# Altium PCB avbrd.PcbDoc
Units mm, origin at the board's own origin, x right, y up, seen from the top; angles counter-clockwise.
Board outline 46.23 x 57.78 mm, 2 copper layers (Top Layer, Bottom Layer), stack 1.671 mm thick; 35 components, 56 nets, 180 pads, 70 vias.
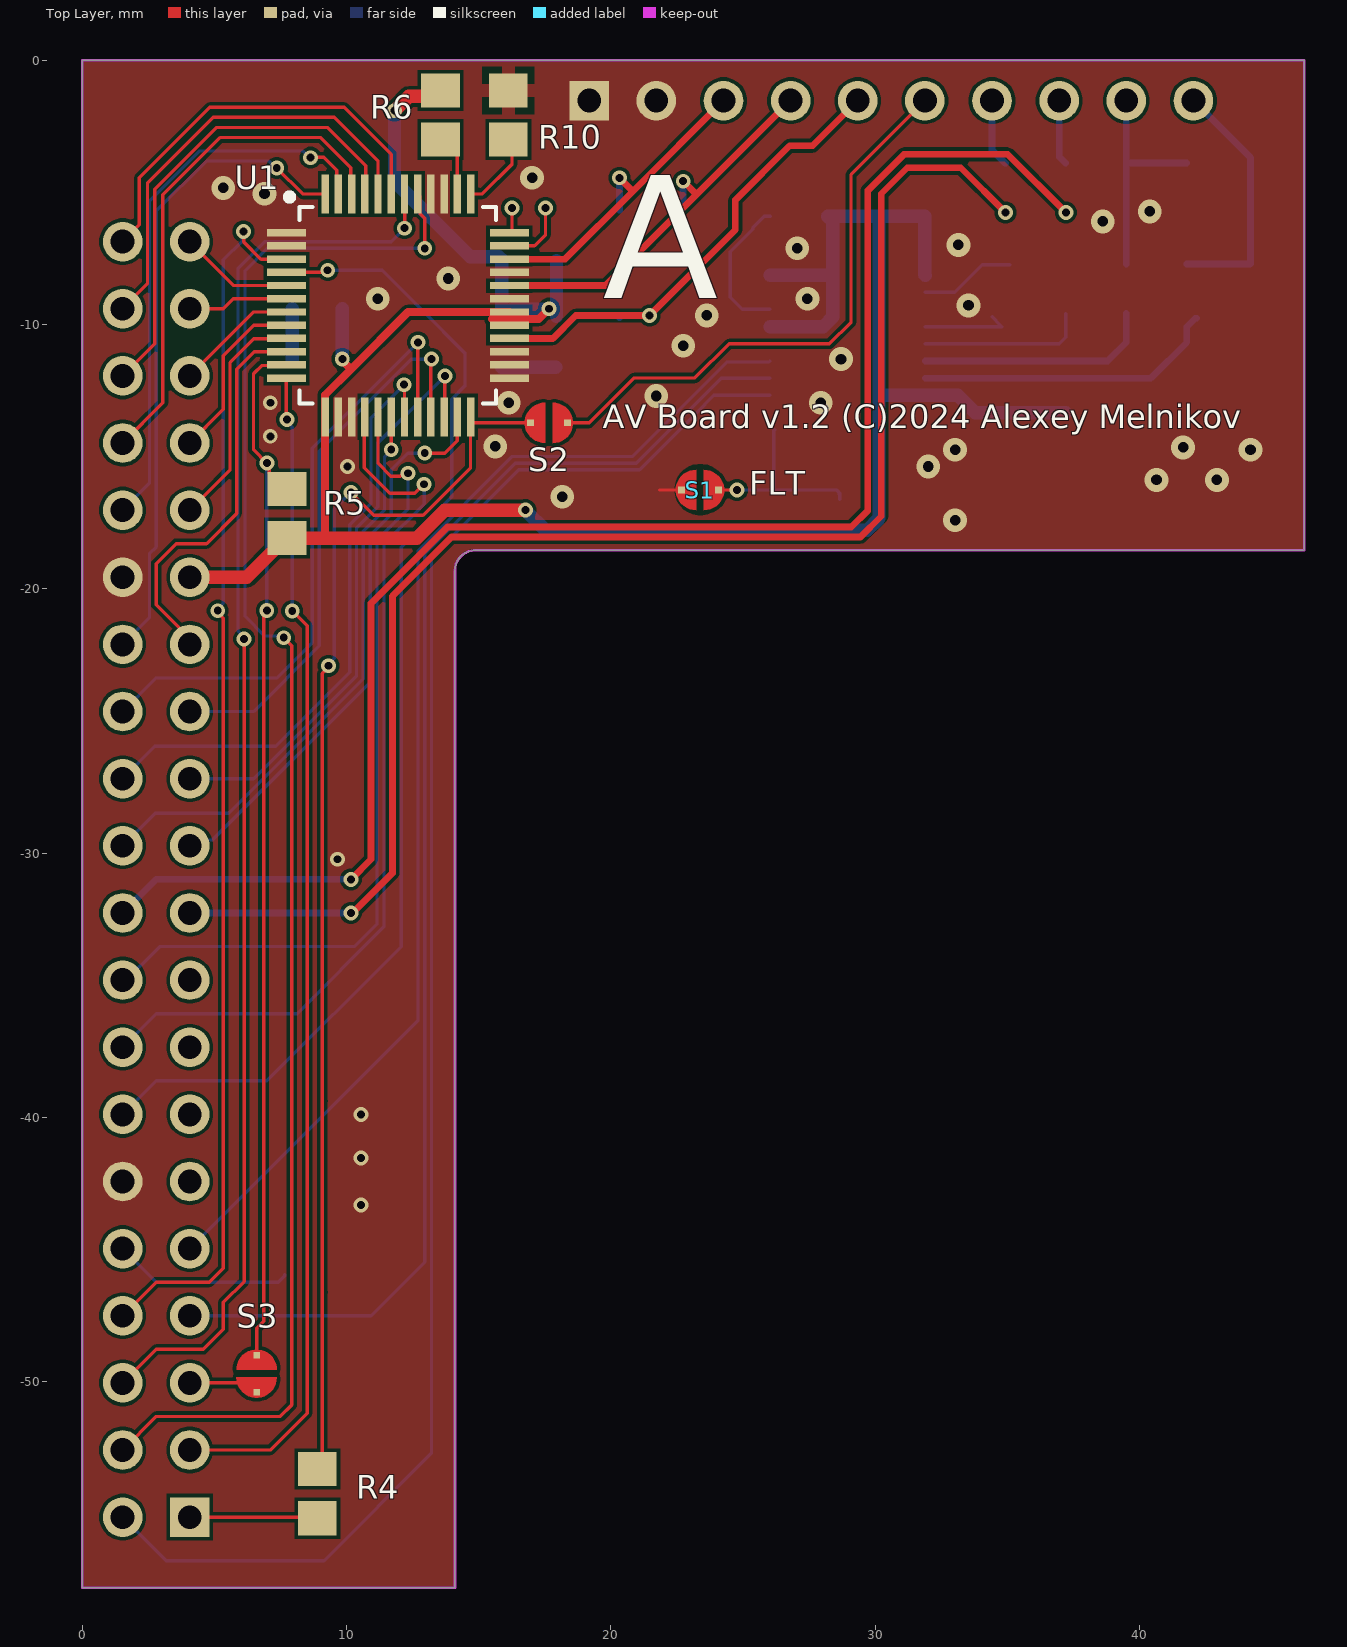
[diagram p0: Top Layer view]
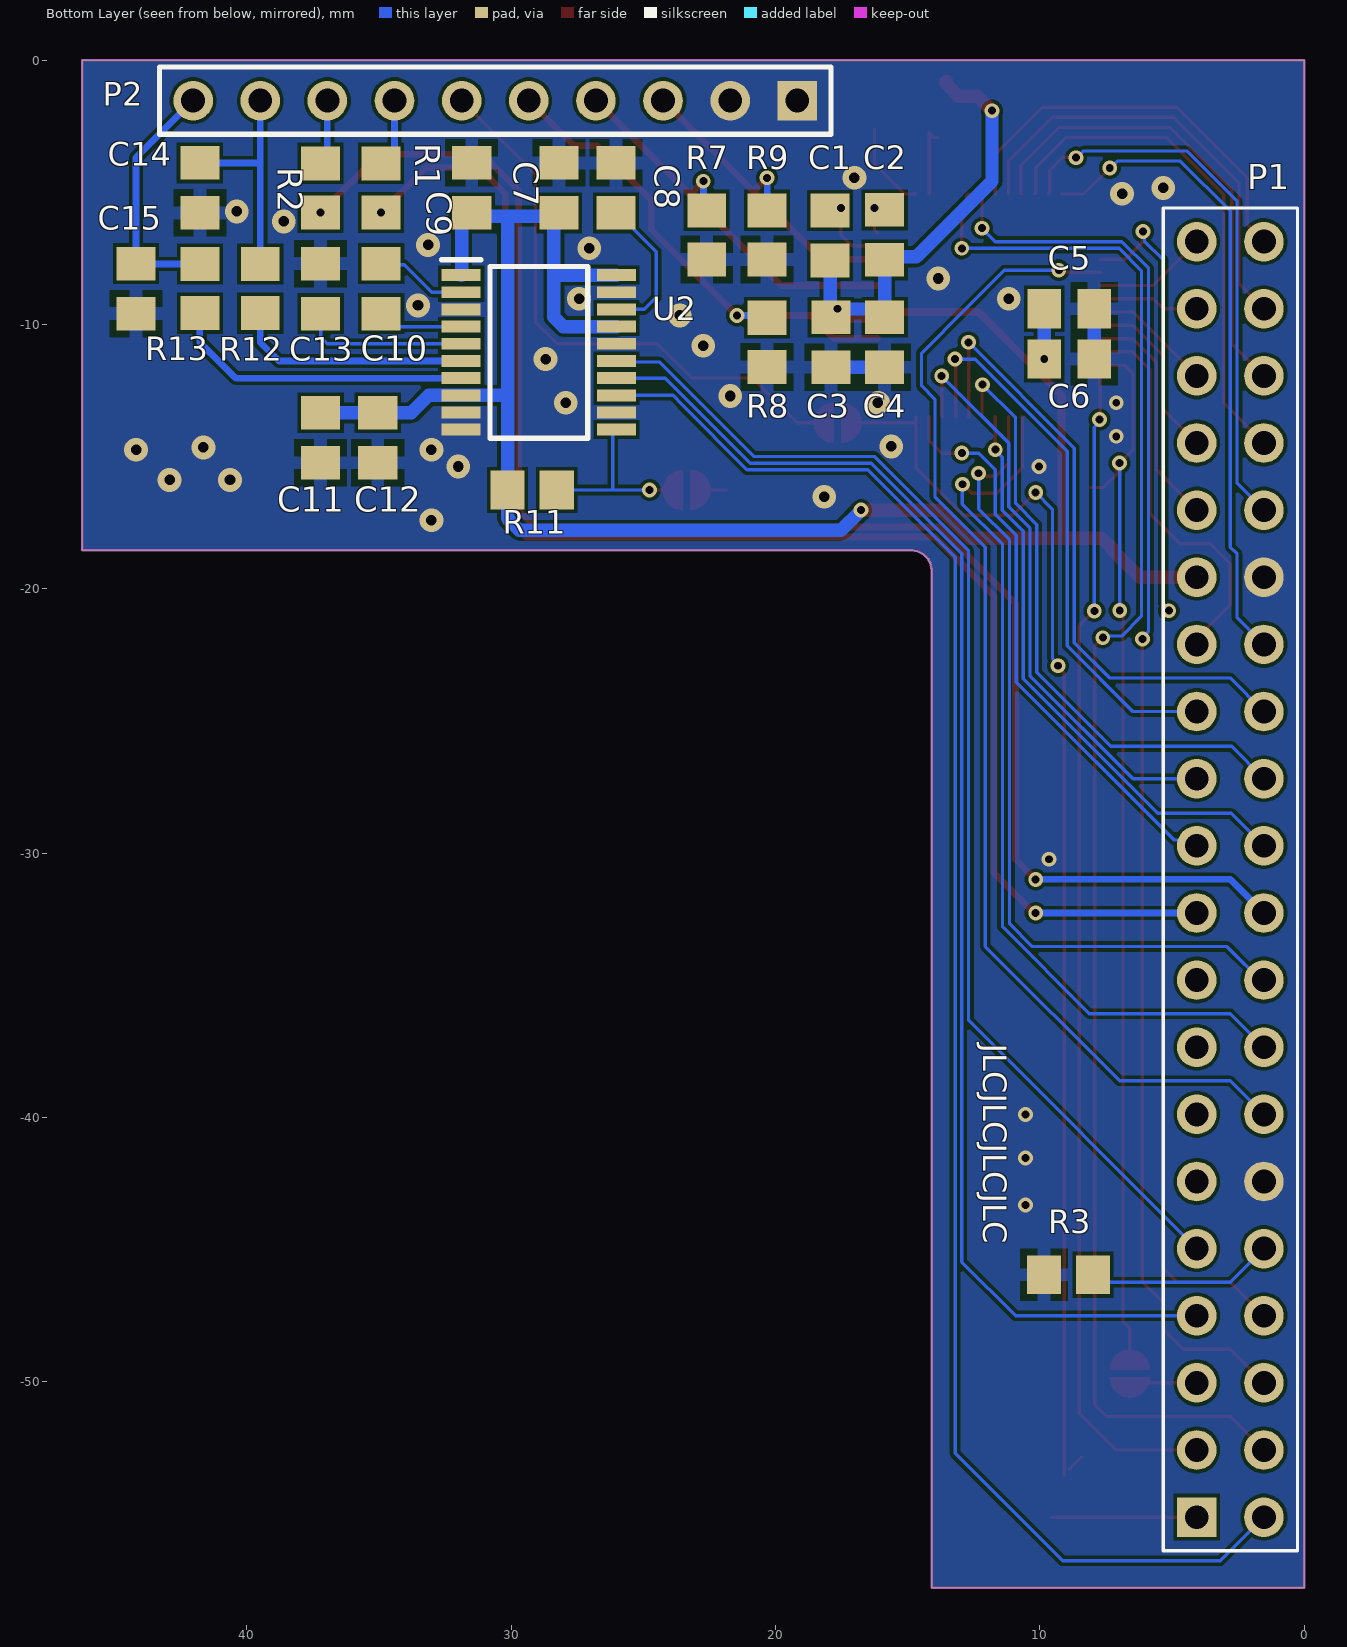
[diagram p1: Bottom Layer view, seen from below]
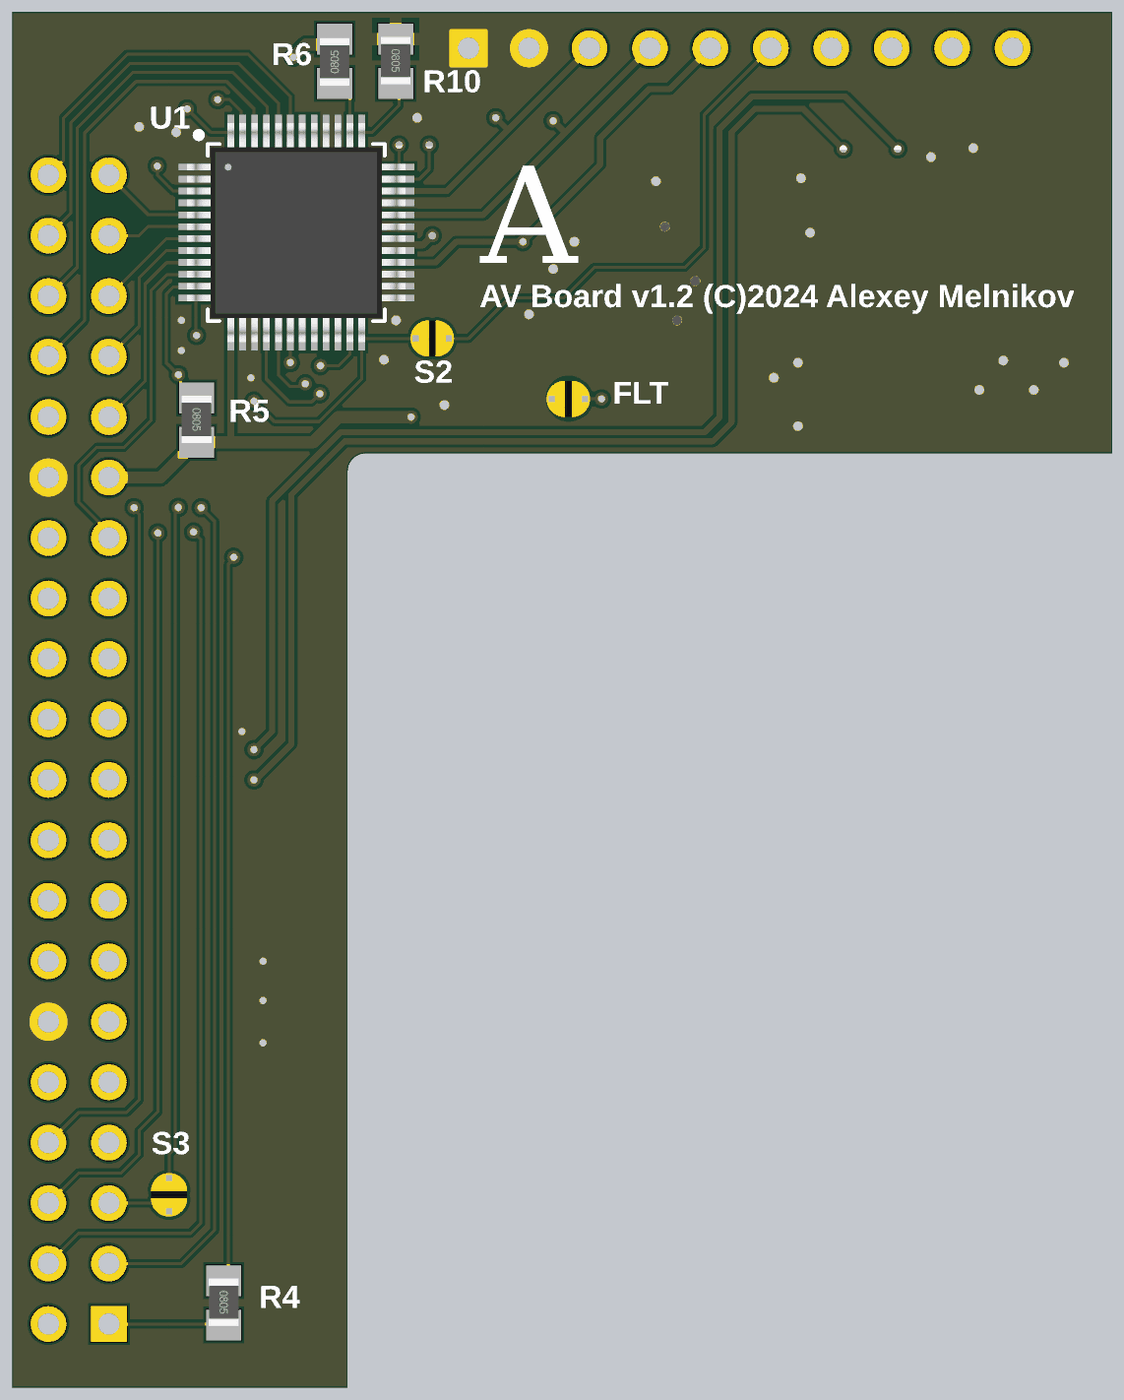
[diagram p2: 3D render of the assembled board from above, using the file's embedded part models]
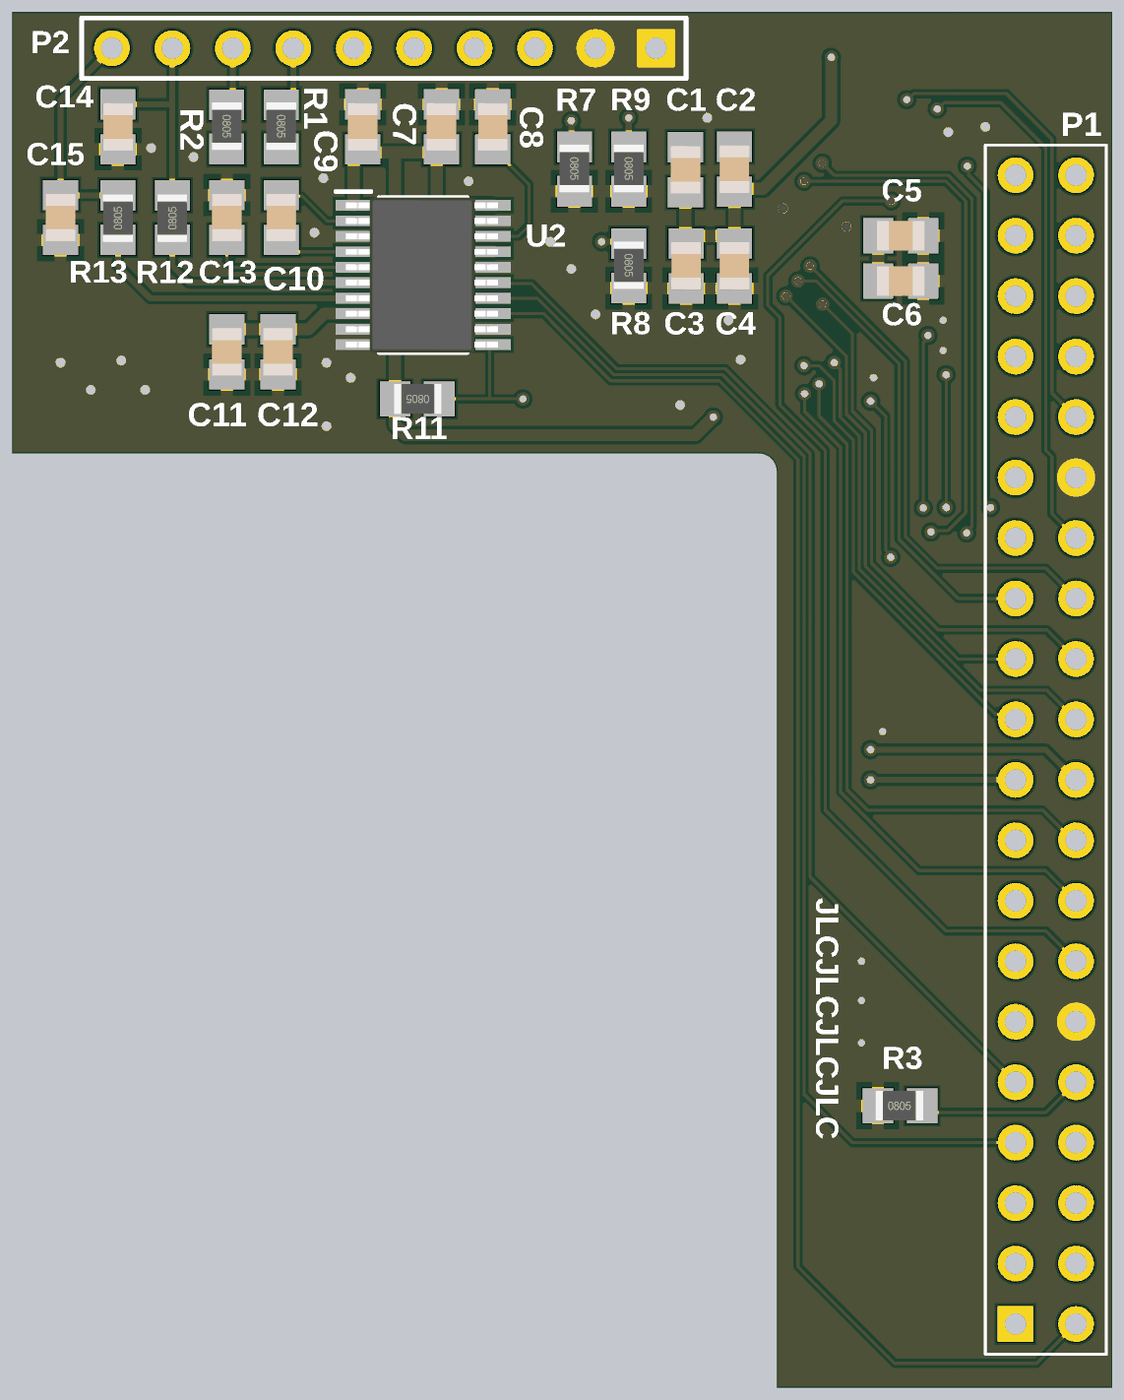
[diagram p3: 3D render of the assembled board from below, using the file's embedded part models]

## Layer stack, top to bottom
Top Solder: solder mask 0.0102, Solder Resist, Dk 3.5
Top Layer: signal copper 0.0356
Dielectric 1: dielectric 1.6, FR-4, Dk 4.8
Bottom Layer: signal copper 0.0356
Bottom Solder: solder mask 0.0102, Solder Resist, Dk 3.5

## Board outline
14.097,-19.304 cw(c14.859,-19.304) 14.859,-18.542 46.228,-18.542 46.228,0 0,0 0,-57.785 14.097,-57.785

## Design rules (kind name [scope] priority, off if disabled: settings)
BoardOutlineClearance [All] p1: gap=0 ignorepadtopadclearanceinfootprint=FALSE
Clearance keep-out_Clearance [OnLayer('Keep-Out Layer')] p1: gap=0 ignorepadtopadclearanceinfootprint=TRUE
Clearance [All] p2: gap=0.127 ignorepadtopadclearanceinfootprint=TRUE
ComponentClearance [All] p1 off: gap=0.254 collisioncheckmode=3 verticalgap=0.254 showdistances=FALSE
DiffPairsRouting [All] p1: maxlimit=0.254 minlimit=0.254 mostfreqgap=0.254 toplayer_minwidth=0.381 toplayer_maxwidth=0.381 toplayer_prefwidth=0.381 bottomlayer_minwidth=0.381 bottomlayer_maxwidth=0.381 bottomlayer_prefwidth=0.381 substack1={E4E31694-489D-4C8D-B382-0CE1957CDCA8} toplayer_{e4e31694-489d-4c8d-b382-0ce1957cdca8}_minwidth=0.381 toplayer_{e4e31694-489d-4c8d-b382-0ce1957cdca8}_maxwidth=0.381 toplayer_{e4e31694-489d-4c8d-b382-0ce1957cdca8}_prefwidth=0.381 bottomlayer_{e4e31694-489d-4c8d-b382-0ce1957cdca8}_minwidth=0.381 bottomlayer_{e4e31694-489d-4c8d-b382-0ce1957cdca8}_maxwidth=0.381 bottomlayer_{e4e31694-489d-4c8d-b382-0ce1957cdca8}_prefwidth=0.381 maxuncoupledlength=12.7
Height [All] p1 off: minheight=0 maxheight=25.4 prefheight=12.7
HoleSize [All] p1: absolutevalues=TRUE maxlimit=5 minlimit=0.025 maxpercent=80.000 minpercent=20.000
MinimumSolderMaskSliver [All] p1: minsoldermaskwidth=0.127
PlaneClearance [All] p1: clearance=0.254
PolygonConnect PolygonConnect_comp [HasFootprint('C0805')] p1: connectstyle=Relief reliefconductorwidth=0.508 reliefentries=4 polygonreliefangle="90 Angle" airgapwidth=0.254
PolygonConnect PolygonConnect_comp_2 [HasFootprint('microsd') or HasFootprint('R0805')] p2: connectstyle=Relief reliefconductorwidth=0.508 reliefentries=4 polygonreliefangle="90 Angle" airgapwidth=0.254
PolygonConnect PolygonConnect_comp_3 [HasFootprint('tact 12x12')] p3: connectstyle=Relief reliefconductorwidth=0.508 reliefentries=4 polygonreliefangle="90 Angle" airgapwidth=0.254
PolygonConnect PolygonConnect_comp_1 [HasFootprint('TACT_60X35')] p4: connectstyle=Relief reliefconductorwidth=0.508 reliefentries=4 polygonreliefangle="90 Angle" airgapwidth=0.254
PolygonConnect [All] p5: connectstyle=Direct reliefconductorwidth=0.254 reliefentries=4 polygonreliefangle="90 Angle" airgapwidth=0.254
RoutingVias [All] p1: holewidth=0.3 width=0.56 viastyle="Through Hole" minholewidth=0.3 minwidth=0.56 maxholewidth=0.9 maxwidth=1.5
SilkToSilkClearance [All] p1 off: silktosilkclearance=0.254
SilkToSolderMaskClearance [IsPad] p1 off: minsilkscreentomaskgap=0.254 clearancetoexposedcopper=TRUE
SolderMaskExpansion SolderMaskExpansion_J1 [InComponent('J1')] p1: expansion=0 istentingtop=FALSE
SolderMaskExpansion [All] p2: expansion=0.051 istentingtop=FALSE
Width Width_power [InNetClass('power')] p1: maxlimit=2 minlimit=0.254 preferedwidth=0.508 substack1={E4E31694-489D-4C8D-B382-0CE1957CDCA8} minimp=50.000000 maximp=50.000000 favimp=50.000000
Width Width_signal [All] p2: maxlimit=2 minlimit=0.127 preferedwidth=0.127 substack1={E4E31694-489D-4C8D-B382-0CE1957CDCA8} toplayer_{e4e31694-489d-4c8d-b382-0ce1957cdca8}_minwidth=0.254 toplayer_{e4e31694-489d-4c8d-b382-0ce1957cdca8}_prefwidth=0.254 bottomlayer_{e4e31694-489d-4c8d-b382-0ce1957cdca8}_minwidth=0.254 bottomlayer_{e4e31694-489d-4c8d-b382-0ce1957cdca8}_prefwidth=0.254 minimp=50.000000 maximp=50.000000 favimp=50.000000
22 further rules are at their usual default settings.

## Classes and differential pairs
net class power: VCC

## Components (designator, comment, footprint, x,y, rotation, side; value= is the part's Value field where it differs from the comment)
C1 "C0805" C0805 17.939,-6.627 r270 bottom value=0.1uF
C2 "C0805" C0805 15.875,-6.604 r90 bottom value=0.1uF
C3 "C0805" C0805 17.907,-10.668 r90 bottom value=0.01uF
C4 "C0805" C0805 15.875,-10.668 r90 bottom value=0.1uF
C5 "C0805" C0805 8.89,-9.398 r0 bottom value=0.01uF
C6 "C0805" C0805 8.89,-11.303 r0 bottom value=0.1uF
C7 "C0805" C0805 28.194,-4.826 r270 bottom value=0.1uF
C8 "C0805" C0805 26.035,-4.826 r270 bottom value=0.1uF
C9 "C0805" C0805 31.496,-4.826 r90 bottom value=0.1uF
C10 "C0805" C0805 34.925,-8.636 r90 bottom value=2.2uF
C11 "C0805" C0805 37.211,-14.28 r90 bottom value=0.1uF
C12 "C0805" C0805 35.052,-14.28 r90 bottom value=10uF
C13 "C0805" C0805 37.211,-8.636 r90 bottom value=2.2uF
C14 "C0805" C0805 41.783,-4.826 r90 bottom value=2200
C15 "C0805" C0805 44.196,-8.636 r270 bottom value=2200
P1 "GPIO1" HDR20x2_empty 4.064,-55.118 r90 bottom locked
P2 "AV" HDR1X10 19.177,-1.524 r0 bottom locked
R1 "100" R0805 34.925,-4.826 r270 bottom
R2 "100" R0805 37.211,-4.826 r270 bottom
R3 "1K" R0805 8.921,-45.947 r180 bottom
R4 "33" R0805 8.89,-54.229 r270 top
R5 "47K" R0805 7.747,-17.145 r270 top
R6 "5.1K" R0805 13.549,-2.069 r90 top
R7 "75" R0805 22.606,-6.604 r270 bottom
R8 "75" R0805 20.32,-10.668 r270 bottom
R9 "75" R0805 20.32,-6.604 r270 bottom
R10 "530" R0805 16.117,-2.069 r270 top
R11 "47K" R0805 29.21,-16.256 r0 bottom
R12 "470" R0805 39.497,-8.636 r90 bottom
R13 "470" R0805 41.783,-8.636 r90 bottom
S1 "FLT" SEL 23.368,-16.256 r270 top
S2 "" SEL 17.653,-13.716 r90 top
S3 "" SEL 6.594,-49.688 r180 top
U1 "ADV7125JSTZ330/240 or ADV7123JSTZ330/240" ST_48_ADI 11.938,-9.271 r0 top
U2 "PCM5102" SOP65P640X120-20N 28.956,-11.049 r180 bottom

## Footprints (in the part's own frame and the unit in brackets; to place one, negate y for a bottom-side part, rotate by r counter-clockwise, add the part's x,y. Pads: shape width x height; smd on the part's side, far side on the other; paste and mask are expansions set on the pad)
C0805 [mm] "Capacitor, Chip; 2.35 mm L X 1.35 mm W X 1.00 mm H body"
  rect 1.27x1.48 smd: 1(-0.945,0) 2(0.945,0)
  body extent -1,-0.63 1,0.63, height 0.58
HDR1X10 [mm] "Connector; Header; 10 Position"
  rect 1.5x1.5 hole 0.9: 1(0,0)
  round 1.5 hole 0.9: 2(2.54,0) 3(5.08,0) 4(7.62,0) 5(10.16,0) 6(12.7,0) 7(15.24,0) 8(17.78,0) 9(20.32,0) 10(22.86,0)
  silkscreen extent -1.27,-1.27 24.13,1.27
HDR20x2_empty [mm] "Header, Vertical Receptacle, 2.54 mm pitch; 0.65 mm lead width, 40 pins, 2 rows, 20 pins per row, 50.80 mm L X 5.08 mm W X 11.00 mm H body"
  rect 1.5x1.5 hole 0.9 paste-1.5: 1(0,0)
  round 1.5 hole 0.9 paste-1.5: 2(0,-2.54) 3(2.54,0) 4(2.54,-2.54) 5(5.08,0) 6(5.08,-2.54) 7(7.62,0) 8(7.62,-2.54) 9(10.16,0) 10(10.16,-2.54) 11(12.7,0) 12(12.7,-2.54) 13(15.24,0) 14(15.24,-2.54) 15(17.78,0) 16(17.78,-2.54) 17(20.32,0) 18(20.32,-2.54) 19(22.86,0) 20(22.86,-2.54) 21(25.4,0) 22(25.4,-2.54) 23(27.94,0) 24(27.94,-2.54) 25(30.48,0) 26(30.48,-2.54) 27(33.02,0) 28(33.02,-2.54) 29(35.56,0) 30(35.56,-2.54) 31(38.1,0) 32(38.1,-2.54) 33(40.64,0) 34(40.64,-2.54) 35(43.18,0) 36(43.18,-2.54) 37(45.72,0) 38(45.72,-2.54) 39(48.26,0) 40(48.26,-2.54)
  silkscreen extent -1.27,-3.81 49.53,1.27
R0805 [mm] "Resistor, Chip; 2.32 mm L X 1.25 mm W X 1.00 mm H body"
  rect 1.29x1.47 smd: 1(-0.93,0) 2(0.93,0)
  body extent -1.03,-0.63 0.97,0.63, height 0.42
SEL [mil]
  rect 10x10 smd mask+0: 1(0,27.56) 2(0,-27.56)
  Top Layer region: 1.97,5.55 30,5.55 27.18,18.72 18.87,29.32 6.76,35.22 -6.7,35.22 -18.81,29.32 -27.12,18.72 -29.95,5.55 -29.95,5.55
  Top Layer region: -1.98,-5.49 -30.01,-5.49 -27.19,-18.66 -18.88,-29.26 -6.77,-35.16 6.7,-35.16 18.81,-29.26 27.11,-18.66 29.94,-5.49 29.94,-5.49
SOP65P640X120-20N [mm]
  rect 1.475x0.45 smd mask+0: 1(-2.938,2.925) 2(-2.938,2.275) 3(-2.938,1.625) 4(-2.938,0.975) 5(-2.938,0.325) 6(-2.938,-0.325) 7(-2.938,-0.975) 8(-2.938,-1.625) 9(-2.938,-2.275) 10(-2.938,-2.925) 11(2.938,-2.925) 12(2.938,-2.275) 13(2.938,-1.625) 14(2.938,-0.975) 15(2.938,-0.325) 16(2.938,0.325) 17(2.938,0.975) 18(2.938,1.625) 19(2.938,2.275) 20(2.938,2.925)
  silkscreen extent -3.67,-3.25 1.85,3.5, body extent -3.25,-3.25 3.15,3.25, height 1.13
ST_48_ADI [mil]
  rect 58x11 smd paste+0 mask+0: 1(-166,108.27) 2(-166,88.58) 3(-166,68.9) 4(-166,49.21) 5(-166,29.53) 6(-166,9.84) 7(-166,-9.84) 8(-166,-29.53) 9(-166,-49.21) 10(-166,-68.9) 11(-166,-88.58) 12(-166,-108.27) 25(166,-108.27) 26(166,-88.58) 27(166,-68.9) 28(166,-49.21) 29(166,-29.53) 30(166,-9.84) 31(166,9.84) 32(166,29.53) 33(166,49.21) 34(166,68.9) 35(166,88.58) 36(166,108.27)
  rect 11x58 smd paste+0 mask+0: 13(-108.27,-166) 14(-88.58,-166) 15(-68.9,-166) 16(-49.21,-166) 17(-29.53,-166) 18(-9.84,-166) 19(9.84,-166) 20(29.53,-166) 21(49.21,-166) 22(68.9,-166) 23(88.58,-166) 24(108.27,-166) 37(108.27,166) 38(88.58,166) 39(68.9,166) 40(49.21,166) 41(29.53,166) 42(9.84,166) 43(-9.84,166) 44(-29.53,166) 45(-49.21,166) 46(-68.9,166) 47(-88.58,166) 48(-108.27,166)
  silkscreen extent -166,-146 146,166, body extent -181,-181 181,181, height 63

## Part data
C1 C2 C3 C4 C5 C6 C7 C8 C9 C10 C11 C12 C13 C14 C15: "Ceramic Chip Capacitor - Standard", PackageDocument=Mar-2001, Code_IPC=2012[0805], Code_JEITA=0805, ComponentLink1Description="Manufacturer Link", ComponentLink1URL=http://www.kemet.com/, ComponentLink2Description=Datasheet, ComponentLink2URL=http://www.kemet.com/kemet/web/homepage/kechome.nsf/vapubfilesname/F3102TA.pdf/$file/F3102TA.pdf, DatasheetDocument=Mar-2001, LatestRevisionDate=19-Mar-2004, LatestRevisionNote="Silkscreen size reduced.", Note="Footprint corresponds to dimensions for bulk cassette packaging. This case size has tightened tolerances.", PackageReference=0805, Published=17-Jul-2002, Publisher="Altium Limited"
P1: library part "Header 20X2", "Header, 20-Pin, Dual row", LatestRevisionDate=17-Jul-2002, LatestRevisionNote="Re-released for DXP Platform.", Publisher="Altium Limited"
P2: library part "Header 10", "Header, 10-Pin", LatestRevisionDate=17-Jul-2002, LatestRevisionNote="Re-released for DXP Platform.", Publisher="Altium Limited"
R1 R2 R3 R4 R5 R6 R7 R8 R9 R10 R11 R12 R13: library part ERJ6RS, "Low Ohmic Value Thick Film Chip Resistor, 0.1 Ohm to 0.2 Ohm Range, 1%, 2% and 5% Tolerance, 0805 Size, 0.125 W", PackageDocument=Mar-2003, Code_IPC="2012 [0805]", ComponentLink1Description="Manufacturer Link", ComponentLink1URL=http://www.panasonic.com/industrial/components/resistive_products.htm, ComponentLink2Description=Datasheet, ComponentLink2URL=http://www.panasonic.com/industrial/components/pdf/AOA0000CE3.pdf, LatestRevisionDate=19-Mar-2004, LatestRevisionNote="Silkscreen size reduced.", PackageReference=6-0805, Published=17-Dec-2003, Publisher="Altium Limited"
S1 S2 S3: library part SEL
U1: library part ADV7125JSTZ330, Mfr_Name="Analog Devices Inc", Copyright="Copyright (C) 2024 Ultra Librarian. All rights reserved.", Manufacturer_Part_Number=ADV7125JSTZ330, RefDes=RefDes, Type=DEV
U2: Manufacturer_Name="Texas Instruments", Manufacturer_Part_Number=PCM5102PW, Mouser Part Number=595-PCM5102PW, Datasheet Link=http://www.ti.com/lit/ds/symlink/pcm5102.pdf, Geometry.Height=1.2mm, Mouser Price/Stock=https://www.mouser.co.uk/ProductDetail/Texas-Instruments/PCM5102PW?qs=%252BG2H6gVb6ixUTg8gM%2FsSOw%3D%3D

## Via types
v1: diameter 0.56, hole 0.3, Top Layer to Bottom Layer, tented both sides, 44 vias
v2: diameter 0.9, hole 0.4, Top Layer to Bottom Layer, tented both sides, 26 vias

## Nets (pads, with @x,y where several pads share a name; then routed paths per layer and width w, separated by ;. In a path a pad name is that pad's centre, name@x,y a point inside that pad or via, vN(x,y) a via of type N, cw(c..) or ccw(c..) an arc to the next point about the centre after c; other vN are vias at no path point)
B: P2.5 R8.1 U1.28 | length 18.7
  Top Layer w0.254: U1.28 17.8,-10.521 18.669,-9.652 v1(21.463,-9.652) 24.705,-6.41 24.705,-5.287 26.759,-3.233 27.628,-3.233 P2.5
  Bottom Layer w0.254: R8.1 20.406,-9.652 v1(21.463,-9.652)
B0: P1.16 U1.16 | length 33.9
  Top Layer w0.127: U1.16 10.668,-13.507 10.668,-15.413 11.638,-16.383 12.586,-16.383 v1(12.931,-16.038)
  Bottom Layer w0.127: P1.16 2.794,-36.068 8.128,-36.068 11.412,-32.784 11.412,-18.306 12.931,-16.787 v1(12.931,-16.038)
B1: P1.18 U1.17 | length 31.4
  Top Layer w0.127: U1.17 11.188,-15.252 11.672,-15.736 12.028,-15.736 12.06,-15.704 12.236,-15.704 v1(12.319,-15.621)
  Bottom Layer w0.127: P1.18 1.524,-34.925 2.921,-33.528 10.287,-33.528 11.149,-32.666 11.149,-18.146 12.319,-16.976 v1(12.319,-15.621)
b2: P1.22 U1.18 | length 22.1
  Top Layer w0.127: v1(11.686,-14.73) 11.686,-13.489 U1.18
  Bottom Layer w0.127: P1.22 2.751,-28.491 5.545,-28.491 10.633,-23.403 10.633,-17.815 11.43,-17.018 11.43,-15.021 11.686,-14.764 v1(11.686,-14.73)
b3: P1.24 U1.19 | length 23.2
  Top Layer w0.127: v1(12.174,-12.272) 12.188,-12.286 U1.19
  Bottom Layer w0.127: P1.24 2.745,-25.957 7.317,-25.957 10.117,-23.157 10.117,-17.569 10.922,-16.764 10.922,-13.524 v1(12.174,-12.272)
b4: P1.26 U1.20 | length 24.1
  Top Layer w0.127: U1.20 12.688,-10.68 v1(12.7,-10.668)
  Bottom Layer w0.127: P1.26 2.794,-23.368 7.366,-23.368 8.698,-22.036 8.698,-14.671 v1(12.7,-10.668)
b5: P1.25 U1.21 | length 21.2
  Top Layer w0.127: U1.21 13.188,-11.323 v1(13.208,-11.303)
  Bottom Layer w0.127: P1.25 6.477,-24.638 8.967,-22.148 8.967,-14.782 12.446,-11.303 v1(13.208,-11.303)
b6: P1.23 U1.22 | length 22.2
  Top Layer w0.127: U1.22 13.716,-13.459 v1(13.716,-11.938)
  Bottom Layer w0.127: P1.23 6.477,-27.178 10.375,-23.28 10.375,-17.692 11.176,-16.891 11.176,-14.478 13.383,-12.271 v1(13.716,-11.938)
b7: P1.21 U1.23 | length 21.6
  Top Layer w0.127: v1(12.954,-14.859) 13.716,-14.859 14.188,-14.387 U1.23
  Bottom Layer w0.127: P1.21 4.285,-29.497 4.92,-29.497 10.891,-23.526 10.891,-17.972 11.684,-17.179 11.684,-15.494 12.319,-14.859 v1(12.954,-14.859)
BCLK: P1.2 U2.13 | length 63.3
  Bottom Layer w0.127: P1.2 3.175,-56.769 9.144,-56.769 13.208,-52.705 13.208,-18.796 16.51,-15.494 21.082,-15.494 23.558,-13.018 ; 23.548,-13.007 23.88,-12.674 U2.13
BLANK: R5.1 S3.2 U1.11 | length 40.5
  Top Layer w0.127: S3.2 6.594,-47.975 6.858,-47.711 6.858,-21.054 6.979,-20.932 v1(6.979,-20.815) ; U1.11 7.696,-11.546 6.78,-11.546 6.477,-11.849 6.477,-14.732 v1(6.985,-15.24) 6.985,-15.357 7.076,-15.448 7.076,-15.633 7.602,-16.16 R5.1@8.073,-16.16
  Bottom Layer w0.127: v1(6.979,-20.815) 6.979,-15.246 v1(6.985,-15.24)
DATA: P1.7 U2.14 | length 52.3
  Bottom Layer w0.127: P1.7 10.922,-47.498 12.954,-45.466 12.954,-18.669 16.383,-15.24 20.955,-15.24 24.171,-12.024 U2.14
G: P2.4 R7.1 U1.32 | length 15.4
  Top Layer w0.254: U1.32 19.8,-8.521 23.241,-5.08 ; v1(22.733,-4.572) 23.241,-5.08 ; P2.4 23.241,-5.08
  Bottom Layer w0.254: R7.1 22.725,-5.555 22.725,-4.58 v1(22.733,-4.572)
G0: P1.8 U1.3 | length 46.5
  Top Layer w0.127: P1.8 2.794,-46.228 4.805,-46.228 5.334,-45.699 5.334,-21.114 5.122,-20.902 v1(5.122,-20.823) ; v1(6.096,-6.477) 6.111,-6.492 6.111,-6.873 6.759,-7.521 U1.3
  Bottom Layer w0.127: v1(5.122,-20.823) 5.122,-20.744 5.334,-20.532 5.334,-7.545 6.043,-6.836 6.043,-6.53 v1(6.096,-6.477)
g1: P1.14 U1.4 | length 44.7
  Top Layer w0.127: U1.4 9.203,-8.021 v1(9.284,-7.941)
  Bottom Layer w0.127: P1.14 2.794,-38.608 6.985,-38.608 12.065,-33.528 12.065,-18.415 13.97,-16.51 13.97,-12.827 14.478,-12.319 14.478,-11.075 12.817,-9.414 11.344,-7.941 v1(9.284,-7.941)
g2: P1.39 U1.5 | length 4.3
  Top Layer w0.127: P1.39 5.727,-8.521 U1.5
g3: P1.37 U1.6 | length 3.8
  Top Layer w0.127: P1.37 5.334,-9.398 5.715,-9.017 7.718,-9.017 U1.6
g4: P1.35 U1.7 | length 4.7
  Top Layer w0.127: P1.35 6.481,-9.521 U1.7
g5: P1.33 U1.8 | length 6.7
  Top Layer w0.127: P1.33 5.334,-13.208 5.334,-11.176 6.488,-10.022 7.72,-10.022 U1.8
g6: P1.31 U1.9 | length 8.7
  Top Layer w0.127: P1.31 5.588,-15.494 5.588,-11.43 6.488,-10.53 7.712,-10.53 U1.9
g7: P1.27 U1.10 | length 15
  Top Layer w0.127: P1.27 4.064,-21.865 2.794,-20.595 2.794,-19.05 3.556,-18.288 4.699,-18.288 5.842,-17.145 5.842,-11.684 6.497,-11.029 7.713,-11.029 U1.10
GND: C3.1 C4.1 C5.1 C6.1 C7.1 C8.1 C9.2 C11.1 C12.1 C13.2 C14.1 C15.2 P1.12 P1.30 P2.1 P2.2 R3.1 R7.2 R8.2 R9.2 R10.1 S1.2 U1.1 U1.2 U1.14 U1.15 U1.25 U1.26 U1.27 U1.31 U1.33 U1.39 U1.40 U2.3 U2.9 U2.10 U2.12 U2.16 U2.19 | length 4.8
  Top Layer w0.127: 21.844,-16.256 S1.2
  Bottom Layer w0.508: C6.1 C5.1 ; C4.1 C3.1
  other v1: 10.541,-43.307 10.541,-41.529 10.541,-39.878 9.652,-30.226 10.033,-15.367 7.112,-14.224 7.112,-12.954
  other v2: 33.02,-17.399 18.161,-16.51 40.64,-15.875 42.926,-15.875 32.004,-15.367 33.02,-14.732 44.196,-14.732 41.645,-14.643 15.621,-14.605 16.129,-12.954 27.94,-12.954 21.717,-12.7 28.702,-11.303 22.733,-10.795 23.622,-9.652 33.528,-9.271 11.176,-9.017 27.432,-9.017 13.843,-8.255 27.051,-7.112 33.147,-6.985 38.608,-6.096 40.386,-5.715 6.891,-5.052 5.334,-4.826 17.018,-4.445
HSync: P2.8 R2.1 | length 2.8
  Bottom Layer w0.127: P2.8 P2.8@37.211,-1.778
  Bottom Layer w0.254: P2.8 36.957,-3.642 R2.1
LEFT: C14.2 P2.9 R12.2 | length 8.5
  Bottom Layer w0.254: R12.2 39.497,-3.881 ; P2.9 39.497,-3.881 ; C14.2 39.497,-3.881
LRCLK: P1.9 U2.15 | length 46.3
  Bottom Layer w0.127: P1.9 12.7,-36.322 12.7,-18.549 16.263,-14.986 20.828,-14.986 24.402,-11.412 25.98,-11.412 U2.15
NetC1_1: C1.1 U1.35 | length 2.6
  Top Layer w0.127: U1.35 17.109,-7.021 17.526,-6.604 v1(17.526,-5.588)
NetC2_2: C2.2 U1.36 | length 1
  Top Layer w0.127: U1.36 16.18,-6.521 16.256,-6.445 v1(16.256,-5.588)
NetC8_2: C8.2 U2.18 | length 5.5
  Bottom Layer w0.127: U2.18 24.966,-9.424 24.511,-8.969 24.511,-7.242 25.358,-6.395 25.358,-6.342 25.803,-5.898 C8.2@26.035,-5.898
NetC10_1: C10.1 U2.4 | length 3.4
  Bottom Layer w0.127: U2.4 C10.1@34.783,-10.074 ; C10.1@34.422,-9.702 C10.1@34.753,-10.033
NetC10_2: C10.2 U2.2 | length 3.6
  Bottom Layer w0.127: U2.2 33.009,-8.774 34.051,-7.732 C10.2@35.082,-7.732
NetC13_1: C13.1 U2.5 | length 6.3
  Bottom Layer w0.127: U2.5 36.964,-10.724 37.211,-10.477 C13.1
NetP1_5: P1.5 S3.1 | length 2.5
  Top Layer w0.127: P1.5 6.518,-50.038
NetP1_10: P1.10 R3.2 | length 6.8
  Bottom Layer w0.127: P1.10 2.794,-46.228 7.41,-46.228 7.658,-45.98 R3.2@7.658,-45.947
NetP1_19: P1.19 R1.2 | length 56.5
  Top Layer w0.127: v1(10.16,-32.258) v1@10.227,-32.258
  Top Layer w0.254: v1@10.227,-32.258 11.733,-30.752 11.733,-20.271 13.97,-18.034 29.441,-18.034 30.226,-17.249 30.226,-5.046 31.208,-4.064 33.233,-4.064 v1(34.925,-5.756)
  Bottom Layer w0.254: P1.19 v1(10.16,-32.258)
NetP1_20: P1.20 R2.2 | length 61.3
  Top Layer w0.254: v1(10.16,-30.988) 10.922,-30.226 10.922,-20.543 13.812,-17.653 29.093,-17.653 29.718,-17.028 29.718,-4.919 31.081,-3.556 35.011,-3.556 v1(37.211,-5.756)
  Bottom Layer w0.254: P1.20 2.794,-30.988 v1(10.16,-30.988)
NetR4_1: R4.1 S2.1 U1.24 | length 48.1
  Top Layer w0.127: R4.1@8.423,-52.832 R4.1 ; R4.1@9.079,-53.532 9.079,-49.954 9.077,-49.953 9.077,-49.869 9.079,-49.868 9.079,-46.652 cw(c9.718,-46.609) 9.079,-46.566 9.079,-39.413 cw(c9.718,-39.37) 9.079,-39.327 9.079,-37.508 9.077,-37.507 9.077,-37.423 9.079,-37.422 9.079,-23.197 9.311,-22.965 v1(9.311,-22.906) ; v1(10.16,-16.349) 11.019,-17.209 12.89,-17.209 14.688,-15.411 U1.24@14.688,-13.64 ; U1.24 U1.24@14.688,-13.64 ; S2.1 14.764,-13.716 U1.24@14.688,-13.64
  Bottom Layer w0.127: v1(9.311,-22.906) 9.311,-22.829 9.525,-22.615 9.525,-16.984 v1(10.16,-16.349)
NetR6_1: R6.1 U1.38 | length 2.7
  Top Layer w0.127: R6.1@13.843,-2.921 14.008,-2.921 14.188,-2.741 U1.38
NetR10_2: R10.2 U1.37 | length 3.4
  Top Layer w0.127: U1.37 15.138,-5.055 16.256,-3.937 R10.2@16.256,-2.581
NetR11_1: R11.1 S1.1 U2.11 | length 7.4
  Top Layer w0.127: 23.888,-16.371 24.003,-16.256 S1.1 v1(24.765,-16.256)
  Bottom Layer w0.127: v1(24.765,-16.256) 26.162,-16.256 ; U2.11@26.198,-13.974 26.162,-14.01 26.162,-16.256 ; R11.1@28.634,-16.41 28.661,-16.437 R11.1@28.661,-16.617 ; R11.1@28.661,-16.383 28.534,-16.256 R11.1 26.162,-16.256
NetR12_1: R12.1 U2.6 | length 9
  Bottom Layer w0.254: U2.6 38.791,-11.374 39.497,-10.668 R12.1
NetR13_1: R13.1 U2.7 | length 11.6
  Bottom Layer w0.254: U2.7 40.427,-12.024 41.783,-10.668 41.783,-10.084 42.11,-9.757 R13.1@42.164,-9.757
R: P2.3 R9.1 U1.34 | length 12.6
  Top Layer w0.254: U1.34 18.26,-7.521 20.828,-4.953 P2.3 ; v1(20.32,-4.445) 20.777,-4.902 20.879,-4.902
  Bottom Layer w0.254: R9.1 v1(20.32,-4.445)
R0: P1.4 U1.41 | length 60.5
  Top Layer w0.127: P1.4 2.794,-51.308 7.493,-51.308 7.927,-50.874 7.927,-22.151 v1(7.62,-21.844) ; U1.41 12.764,-5.131 12.764,-5.777 12.954,-5.966 v1(12.954,-7.112)
  Bottom Layer w0.127: v1(7.62,-21.844) 7.558,-21.782 6.906,-21.782 6.157,-21.033 6.157,-7.957 7.002,-7.112 v1(12.954,-7.112)
R1: P1.6 U1.42 | length 53.4
  Top Layer w0.127: P1.6 2.794,-48.768 4.572,-48.768 5.334,-48.006 5.334,-46.99 6.122,-46.202 v1(6.122,-21.888) ; U1.42 12.192,-5.059 v1(12.192,-6.35)
  Bottom Layer w0.127: v1(6.122,-21.888) 6.122,-21.829 5.89,-21.597 5.89,-7.864 6.897,-6.858 11.684,-6.858 v1(12.192,-6.35)
r2: P1.40 U1.43 | length 15.5
  Top Layer w0.127: P1.40 2.159,-6.223 2.159,-4.445 4.826,-1.778 9.906,-1.778 11.688,-3.56 U1.43
r3: P1.38 U1.44 | length 16.8
  Top Layer w0.127: P1.38 2.465,-8.457 2.465,-4.647 4.953,-2.159 9.525,-2.159 11.188,-3.822 U1.44
r4: P1.36 U1.45 | length 18.2
  Top Layer w0.127: P1.36 2.743,-10.719 2.743,-4.877 5.08,-2.54 9.271,-2.54 10.719,-3.988 10.719,-5.024 U1.45
r5: P1.34 U1.46 | length 19.5
  Top Layer w0.127: P1.34 3.048,-12.954 3.048,-5.08 5.207,-2.921 9.017,-2.921 10.16,-4.064 10.16,-5.027 U1.46
r6: P1.32 U1.47 | length 21.2
  Top Layer w0.127: v1(8.636,-3.683) 8.65,-3.669 9.13,-3.669 9.625,-4.164 9.625,-4.991 U1.47
  Bottom Layer w0.127: P1.32 2.54,-16.002 2.54,-5.334 4.445,-3.429 8.345,-3.429 8.599,-3.683 v1(8.636,-3.683)
r7: P1.28 U1.48 | length 24.6
  Top Layer w0.127: v1(7.356,-4.075) 8.336,-5.055 U1.48
  Bottom Layer w0.127: P1.28 2.54,-21.082 2.54,-18.669 2.794,-18.415 2.794,-5.698 4.682,-3.81 7.065,-3.81 7.33,-4.075 v1(7.356,-4.075)
RIGHT: C15.1 P2.10 R13.2 | length 9.5
  Bottom Layer w0.254: R13.2 44.181,-7.706 C15.1 44.196,-3.683 P2.10
SYNC: P1.3 U1.12 | length 44.5
  Top Layer w0.127: P1.3 7.112,-52.578 8.509,-51.181 8.509,-21.397 v1(7.941,-20.829) ; U1.12 7.722,-13.564 v1(7.747,-13.589)
  Bottom Layer w0.127: v1(7.747,-13.589) 7.747,-13.685 7.941,-13.88 v1(7.941,-20.829)
VCC: C1.2 C2.1 C3.2 C4.2 C5.2 C6.2 C7.2 C9.1 C11.2 C12.2 P1.29 R5.2 R6.2 R11.2 U1.13 U1.29 U1.30 U2.1 U2.8 U2.17 U2.20 | length 95.6
  Top Layer w0.3: 9.188,-17.911 U1.13 9.188,-12.656 10.16,-11.684 ; v1(9.835,-11.303) 9.835,-11.359 10.16,-11.684 ; 15.494,-9.784 17.267,-9.784 v1(17.653,-9.398) ; U1.30@16.154,-9.525 12.319,-9.525 10.16,-11.684
  Top Layer w0.508: P1.29 6.223,-19.558 7.266,-18.515 7.266,-18.466 7.657,-18.075 9.188,-18.075 12.653,-18.075 13.71,-17.018 v1(16.764,-17.018) ; v1(11.811,-1.905) 12.35,-1.366 13.068,-1.366 13.549,-0.885 R6.2@13.549,-0.789
  Bottom Layer w0.508: v1(9.835,-11.303) C5.2 ; v1@11.811,-1.919 11.811,-4.572 14.671,-7.432 15.758,-7.432 C2.1 C4.2 ; C4.2@16.08,-9.596 16.267,-9.408 C3.2@17.907,-9.408 ; v1(16.764,-17.018) 17.526,-17.78 29.695,-17.78 30.14,-17.335 R11.2 30.14,-12.7 ; C3.2@17.939,-9.691 C1.2 ; U2.17 28.026,-10.074 28.39,-9.71 28.39,-6.094 C7.2@28.194,-5.898 ; U2.20 28.321,-8.124 ; C7.2@28.321,-5.898 30.099,-5.898 ; U2.1 31.877,-8.107 31.877,-5.898 30.099,-5.898 ; C11.2 C12.2 33.782,-13.335 33.121,-12.674 U2.8 30.166,-12.674 30.14,-12.7 ; 30.099,-5.898 30.14,-5.939 30.14,-12.7
VCLK: P1.1 R4.2 | length 5.5
  Top Layer w0.127: P1.1 R4.2@9.53,-55.118
VCLK1: P2.6 S2.2 | length 22.3
  Top Layer w0.127: 17.873,-13.716 S2.2 19.177,-13.716 20.876,-12.017 23.179,-12.017 24.472,-10.724 28.265,-10.724 29.083,-9.906 29.083,-4.318 P2.6
VSync: P2.7 R1.1 | length 2.6
  Bottom Layer w0.127: P2.7@34.417,-1.733 P2.7
  Bottom Layer w0.254: P2.7@34.417,-1.733 34.417,-3.388 R1.1
pads on no net: P1.11 P1.13 P1.15 P1.17

## Polygon pours and split planes (outlines as drawn)
GND on Top Layer "ground" (solid, remove dead copper, pour order 3): 14.097,-19.304 cw(c14.859,-19.304) 14.859,-18.542 46.228,-18.542 46.228,0 0,0 0,-57.785 14.097,-57.785
GND on Bottom Layer "ground" (solid, remove dead copper, pour order 4): 14.097,-19.304 cw(c14.859,-19.304) 14.859,-18.542 46.228,-18.542 46.228,0 0,0 0,-57.785 14.097,-57.785

## Keep-outs
Keep-Out Layer:
  the board outline again, w0.1

## Other copper
Top Layer:
  pour cut-out: 23.377,-17.213 cw(c23.377,-16.243) 22.407,-16.243 cw(c23.377,-16.243) 23.377,-15.273 cw(c23.377,-16.243) 24.347,-16.243 cw(c23.377,-16.243)

## Silkscreen, mask and mechanical layers (free items; w line width, h text height)
Top Overlay:
  text "A" at 19.685,-10.541 h8
  text "AV Board v1.2 (C)2024 Alexey Melnikov" at 19.685,-14.224 h1.52
Bottom Overlay:
  text "JLCJLCJLCJLC" at 12.446,-37.211 h1.52 r90